# EAGLE board Circuit-PCB (EAGLE 9.2.0)
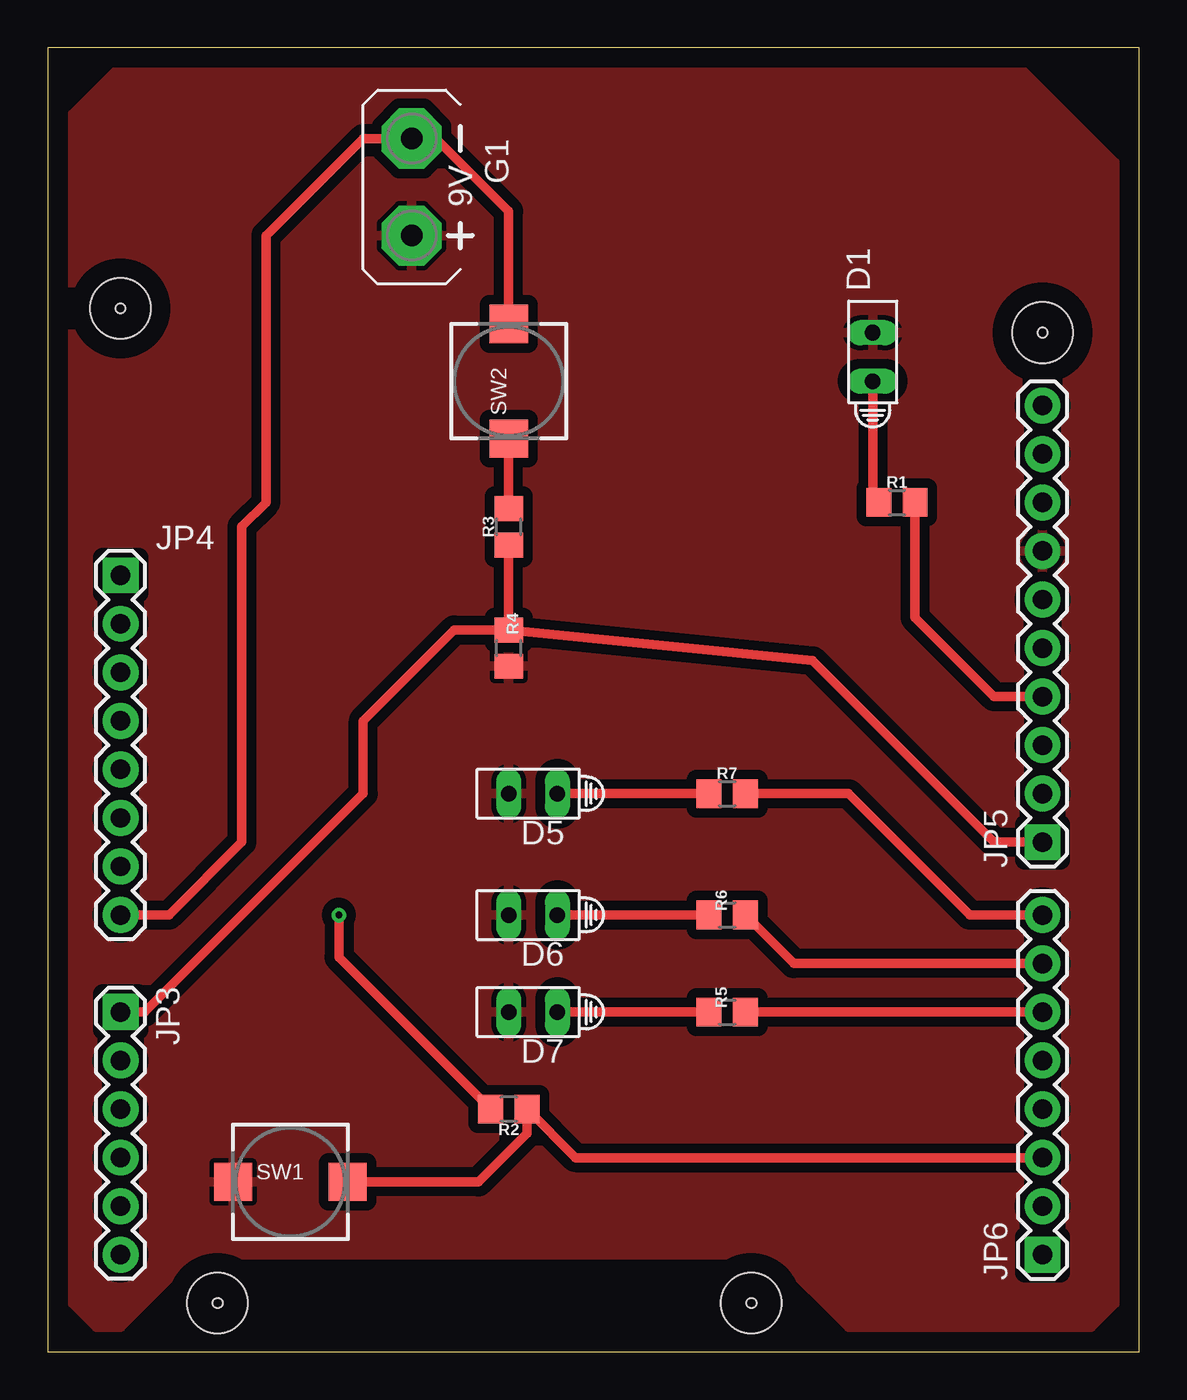
[diagram p0: board, top side]
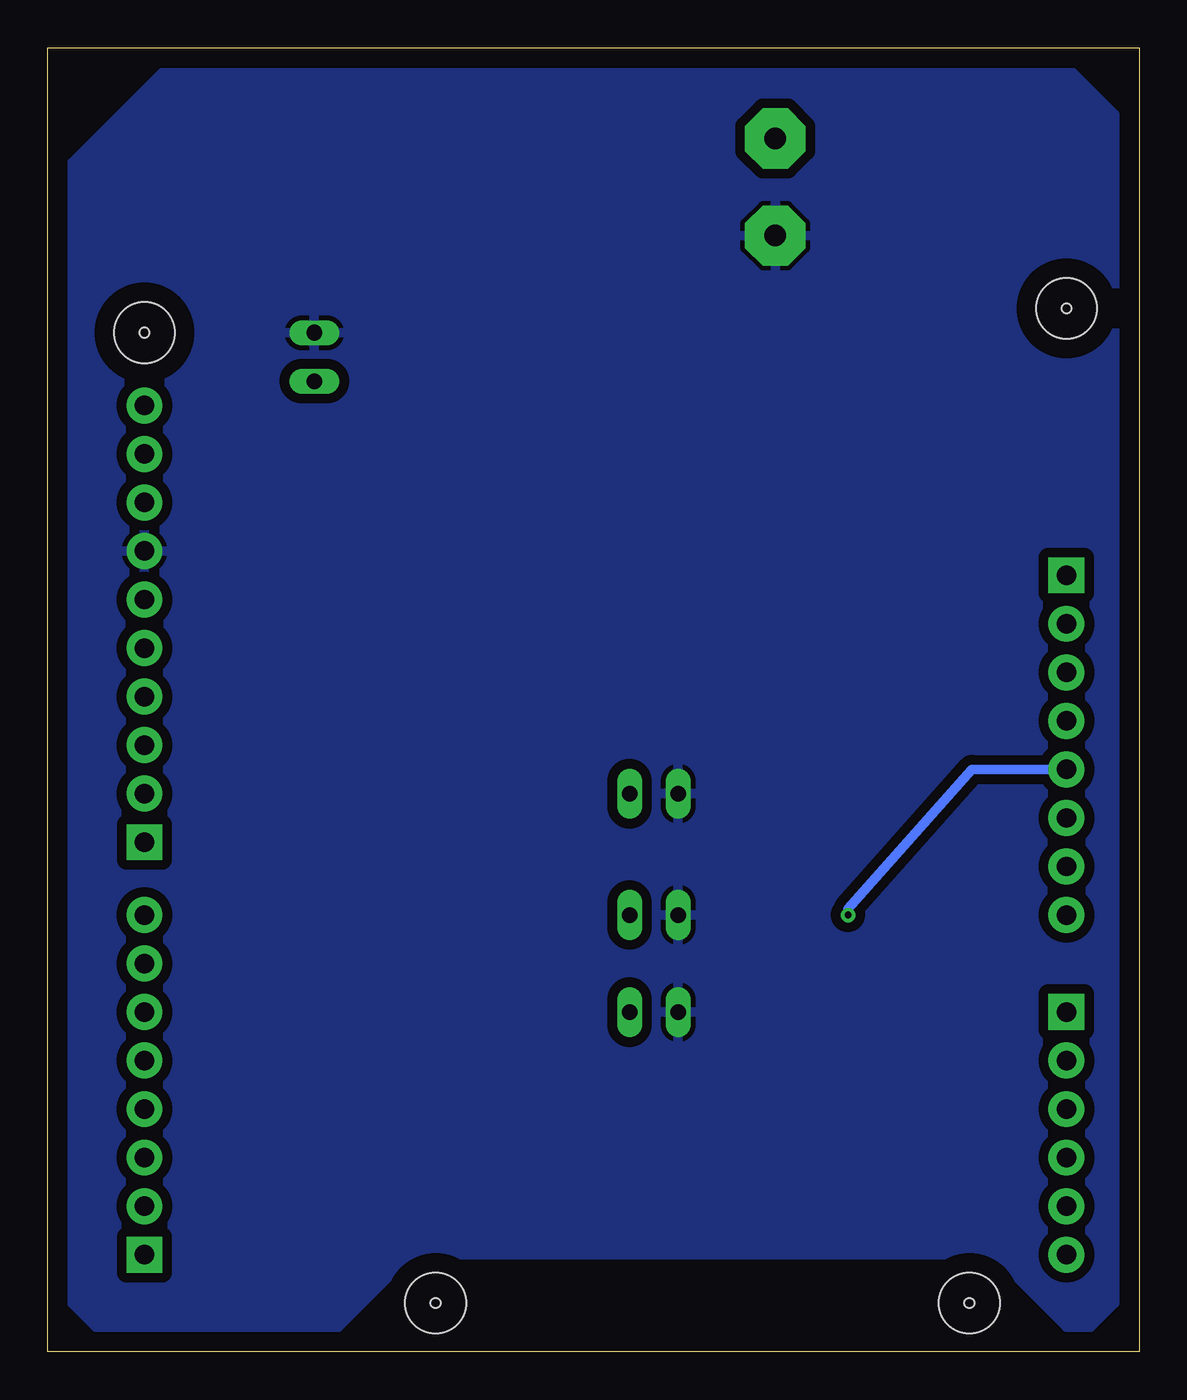
[diagram p1: board, bottom side, seen from below]

Size 57.13 x 68.25 mm. Coordinates in mm from the lower left corner, seen from the top.
Outline: 0,0 57.13,0 57.13,68.25 0,68.25 0,0
Copper layers (1*16): Top 0.035mm / dielectric 1.5mm / Bottom 0.035mm
Design rules "default *": minimum track width 6mil, minimum drill 0.35mm, track to track 20mil, track to pad 20mil, pad to pad 20mil, via to via 20mil, smd to smd 20mil, copper to edge 40mil, drill to drill 6mil, minimum pad ring 10mil, minimum via ring 8mil, stop-mask expansion 4mil, vias tented up to drill 0mil, thermal gap 10mil
Holes 0.51 mm at 8.89,2.54 36.83,2.54 3.81,54.61 52.07,53.34
Holes 3.17 mm at 52.07,53.34 8.89,2.54 36.83,2.54 3.81,54.61

## Footprints (pad centres in the part's own frame; a part is rotated, then mirrored left to right if it is on the bottom)
HLMP6 = drill 0.813 long: A -1.27,0; K 1.27,0
AB9V = drill 1.118 pad 3.15 octagon: + 0,2.54; - 0,-2.54
CONN-1X06 = drill 1.016 pad 1.88 square: 1 0,0 | drill 1.016 pad 1.88: 2 2.54,0; 3 5.08,0; 4 7.62,0; 5 10.16,0; 6 12.7,0
CONN-1X08 = drill 1.016 pad 1.88 square: 1 0,0 | drill 1.016 pad 1.88: 2 2.54,0; 3 5.08,0; 4 7.62,0; 5 10.16,0; 6 12.7,0; 7 15.24,0; 8 17.78,0
CONN-1X10 = drill 1.016 pad 1.88 square: 1 0,0 | drill 1.016 pad 1.88: 2 2.54,0; 3 5.08,0; 4 7.62,0; 5 10.16,0; 6 12.7,0; 7 15.24,0; 8 17.78,0; 9 20.32,0; 10 22.86,0
R0805 = smd 1.3 x 1.5: 1 -0.95,0; 2 0.95,0
PUSHBUTTON_SMD_SJ = smd 2 x 2: P$1 3,0; P$2 -3,0

## Placement (x,y rotation side)
D1  HLMP6  [HLMP6]  43.18,52.07 90 top
D5  HLMP6  [HLMP6]  25.4,29.21 180 top
D6  HLMP6  [HLMP6]  25.4,22.86 180 top
D7  HLMP6  [HLMP6]  25.4,17.78 180 top
G1  AB9V  [AB9V]  19.05,60.96 180 top
JP3  [CONN-1X06]  3.81,17.78 270 top
JP4  [CONN-1X08]  3.81,40.64 270 top
JP5  ARDUINO_CONN-IO_HSIP  [CONN-1X10]  52.07,26.67 90 top
JP6  [CONN-1X08]  52.07,5.08 90 top
R1  10k  [R0805]  44.45,44.45 0 top
R2  10k  [R0805]  24.13,12.7 180 top
R3  10k  [R0805]  24.13,43.18 90 top
R4  10k  [R0805]  24.13,36.83 90 top
R5  10k  [R0805]  35.56,17.78 0 top
R6  10k  [R0805]  35.56,22.86 0 top
R7  10k  [R0805]  35.56,29.21 0 top
SW1  [PUSHBUTTON_SMD_SJ]  12.7,8.89 0 top
SW2  [PUSHBUTTON_SMD_SJ]  24.13,50.8 90 top

## Library data of the parts
D1 D5-D7 = display-hp; MF: AGILENT TECHNOLOGIES; MPN: HLMP-6500; OC_FARNELL: 1652490; OC_NEWARK: 40K0088
G1 = battery
JP3-JP6 = arduino_jw
R1-R7 = rcl; SPICEPREFIX: R
SW1 SW2 = adafruit

## Nets
GND: D1.K D5.K D6.K D7.K G1.+ JP5.7 R4.1 SW1.P$2
N$1: G1.- JP4.8 SW2.P$1
N$2: JP5.4 R1.2
N$3: D1.A R1.1
N$4: D5.A R7.1
N$5: JP6.3 R2.1 SW1.P$1
N$6: R3.2 SW2.P$2
N$7: D6.A R6.1
N$8: JP6.6 R5.2
N$9: D7.A R5.1
N$10: JP6.7 R6.2
N$11: JP6.8 R7.2
N$13: JP3.1 JP5.1 R3.1 R4.2
N$14: JP4.5 R2.2

## Tracks (layer width: path | path; a pad name or v marks a point on that pad's centre or on a via)
GND
  pour Top: 1.27,64.77 3.81,67.31 50.8,67.31 55.88,62.23 55.88,2.54 54.61,1.27 41.91,1.27 38.1,5.08 7.62,5.08 3.81,1.27 2.54,1.27 1.27,2.54
  pour Bottom: 50.8,67.31 55.88,62.23 55.88,2.54 54.61,1.27 41.91,1.27 38.1,5.08 7.62,5.08 3.81,1.27 2.54,1.27 1.27,2.54 1.27,64.77 3.81,67.31
N$1
  Top 0.508: SW2.P$1 24.13,59.69 20.32,63.5 G1.- 16.51,63.5 11.43,58.42 11.43,44.45 10.16,43.18 10.16,26.67 6.35,22.86 JP4.8
N$2
  Top 0.508: R1.2 45.4,38.42 49.53,34.29 JP5.4
N$3
  Top 0.508: D1.A 43.18,44.77 R1.1
N$4
  Top 0.508: D5.A R7.1
N$5
  Top 0.508: SW1.P$1 22.54,8.89 25.08,11.43 R2.1 27.62,10.16 JP6.3
N$6
  Top 0.508: R3.2 SW2.P$2
N$7
  Top 0.508: D6.A R6.1
N$8
  Top 0.508: R5.2 JP6.6
N$9
  Top 0.508: D7.A R5.1
N$10
  Top 0.508: JP6.7 39.05,20.32 R6.2
N$11
  Top 0.508: R7.2 41.91,29.21 48.26,22.86 JP6.8
N$13
  Top 0.508: R4.2 40.03,36.17 49.53,26.67 JP5.1 | R4.2 R3.1 | JP3.1 5.08,17.78 16.51,29.21 16.51,33.02 21.27,37.78 R4.2
N$14  (via drill 0.35)
  Top 0.508: R2.2 15.24,20.64 v15.24,22.86
  Bottom 0.508: v15.24,22.86 15.24,23.18 8.75,30.48 JP4.5